# EAGLE board sot23 (EAGLE 5.06)
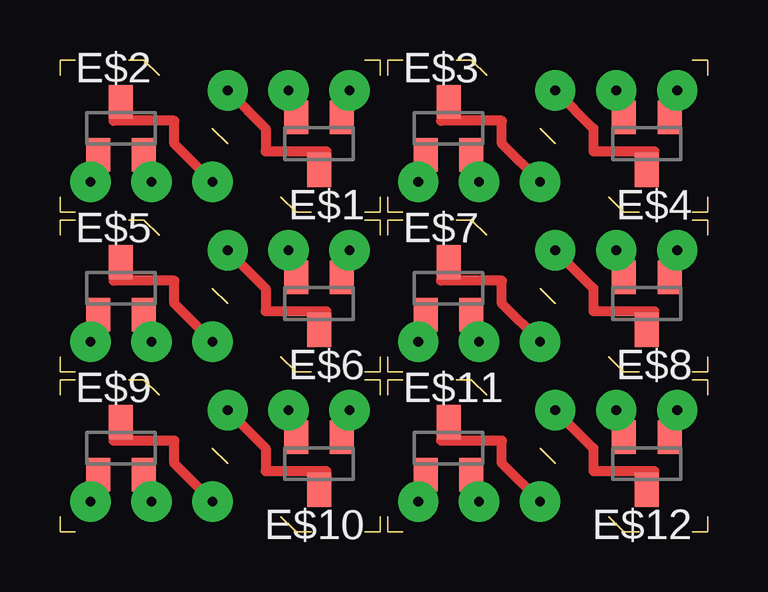
[diagram p0: board, top side]

Size 26.99 x 19.69 mm. Coordinates in mm from the lower left corner, seen from the top.
Outline: 0,19.05 0,19.69 0.64,19.69
Outline: 0.64,13.34 0,13.34 0,13.97
Outline: 13.34,13.97 13.34,13.34 12.7,13.34
Outline: 12.7,19.69 13.34,19.69 13.34,19.05
Outline: 4.13,19.05 3.49,19.69 2.86,19.69
Outline: 9.21,13.97 9.84,13.34 10.48,13.34
Outline: 6.35,16.83 6.98,16.19
Outline: 13.65,19.05 13.65,19.69 14.29,19.69
Outline: 14.29,13.34 13.65,13.34 13.65,13.97
Outline: 26.99,13.97 26.99,13.34 26.35,13.34
Outline: 26.35,19.69 26.99,19.69 26.99,19.05
Outline: 17.78,19.05 17.14,19.69 16.51,19.69
Outline: 22.86,13.97 23.49,13.34 24.13,13.34
Outline: 20,16.83 20.64,16.19
Outline: 0,12.38 0,13.02 0.64,13.02
Outline: 0.64,6.67 0,6.67 0,7.3
Outline: 13.34,7.3 13.34,6.67 12.7,6.67
Outline: 12.7,13.02 13.34,13.02 13.34,12.38
Outline: 4.13,12.38 3.49,13.02 2.86,13.02
Outline: 9.21,7.3 9.84,6.67 10.48,6.67
Outline: 6.35,10.16 6.98,9.53
Outline: 13.65,12.38 13.65,13.02 14.29,13.02
Outline: 14.29,6.67 13.65,6.67 13.65,7.3
Outline: 26.99,7.3 26.99,6.67 26.35,6.67
Outline: 26.35,13.02 26.99,13.02 26.99,12.38
Outline: 17.78,12.38 17.14,13.02 16.51,13.02
Outline: 22.86,7.3 23.49,6.67 24.13,6.67
Outline: 20,10.16 20.64,9.53
Outline: 0,5.71 0,6.35 0.64,6.35
Outline: 0.64,0 0,0 0,0.63
Outline: 13.34,0.63 13.34,0 12.7,0
Outline: 12.7,6.35 13.34,6.35 13.34,5.71
Outline: 4.13,5.71 3.49,6.35 2.86,6.35
Outline: 9.21,0.63 9.84,0 10.48,0
Outline: 6.35,3.49 6.98,2.86
Outline: 13.65,5.71 13.65,6.35 14.29,6.35
Outline: 14.29,0 13.65,0 13.65,0.63
Outline: 26.99,0.63 26.99,0 26.35,0
Outline: 26.35,6.35 26.99,6.35 26.99,5.71
Outline: 17.78,5.71 17.14,6.35 16.51,6.35
Outline: 22.86,0.63 23.49,0 24.13,0
Outline: 20,3.49 20.64,2.86
Copper layers (1*16): Top 0.035mm / dielectric 1.5mm / Bottom 0.035mm
Design rules "default": minimum track width 10mil, minimum drill 24mil, track to track 8mil, track to pad 8mil, pad to pad 8mil, via to via 8mil, smd to smd 8mil, copper to edge 40mil, drill to drill 8mil, minimum pad ring 10mil, minimum via ring 8mil, stop-mask expansion 4mil, vias tented up to drill 0mil, thermal gap 10mil

## Footprints (pad centres in the part's own frame; a part is rotated, then mirrored left to right if it is on the bottom)
SOT23B-3 = smd 1 x 1.4: 1 -0.95,-1.1; 2 0.95,-1.1; 3 0,1.1

## Placement (x,y rotation side)
E$1  [SOT23B-3]  10.79,16.19 180 top
E$2  [SOT23B-3]  2.54,16.83 0 top
E$3  [SOT23B-3]  16.19,16.83 0 top
E$4  [SOT23B-3]  24.45,16.19 180 top
E$5  [SOT23B-3]  2.54,10.16 0 top
E$6  [SOT23B-3]  10.79,9.53 180 top
E$7  [SOT23B-3]  16.19,10.16 0 top
E$8  [SOT23B-3]  24.45,9.53 180 top
E$9  [SOT23B-3]  2.54,3.49 0 top
E$10  [SOT23B-3]  10.79,2.86 180 top
E$11  [SOT23B-3]  16.19,3.49 0 top
E$12  [SOT23B-3]  24.45,2.86 180 top

## Library data of the parts
E$1-E$12 = ref-packages

## Tracks (layer width: path | path; a pad name or v marks a point on that pad's centre or on a via)
S$1  (via drill 0.41 pad 1.68)
  Top 0.406: v6.98,18.41 8.57,16.83 8.57,15.88 11.11,15.88
S$2  (via drill 0.41 pad 1.68)
  other vias: 3.81,14.61
S$3  (via drill 0.41 pad 1.68)
  other vias: 1.27,14.61
S$4  (via drill 0.41 pad 1.68)
  other vias: 12.07,18.41
S$5  (via drill 0.41 pad 1.68)
  other vias: 9.53,18.41
S$6  (via drill 0.41 pad 1.68)
  Top 0.406: v6.35,14.61 4.76,16.19 4.76,17.14 2.22,17.14
S$7  (via drill 0.41 pad 1.68)
  Top 0.406: v20,14.61 18.41,16.19 18.41,17.14 15.88,17.14
S$8  (via drill 0.41 pad 1.68)
  other vias: 14.92,14.61
S$9  (via drill 0.41 pad 1.68)
  other vias: 17.46,14.61
S$10  (via drill 0.41 pad 1.68)
  Top 0.406: v20.64,18.41 22.22,16.83 22.22,15.88 24.76,15.88
S$11  (via drill 0.41 pad 1.68)
  other vias: 25.72,18.41
S$12  (via drill 0.41 pad 1.68)
  other vias: 23.18,18.41
S$13  (via drill 0.41 pad 1.68)
  Top 0.406: v6.35,7.94 4.76,9.53 4.76,10.48 2.22,10.48
S$14  (via drill 0.41 pad 1.68)
  other vias: 1.27,7.94
S$15  (via drill 0.41 pad 1.68)
  other vias: 3.81,7.94
S$16  (via drill 0.41 pad 1.68)
  Top 0.406: v6.98,11.75 8.57,10.16 8.57,9.21 11.11,9.21
S$17  (via drill 0.41 pad 1.68)
  other vias: 12.07,11.75
S$18  (via drill 0.41 pad 1.68)
  other vias: 9.53,11.75
S$19  (via drill 0.41 pad 1.68)
  Top 0.406: v20,7.94 18.41,9.53 18.41,10.48 15.88,10.48
S$20  (via drill 0.41 pad 1.68)
  other vias: 14.92,7.94
S$21  (via drill 0.41 pad 1.68)
  other vias: 17.46,7.94
S$22  (via drill 0.41 pad 1.68)
  Top 0.406: v20.64,11.75 22.22,10.16 22.22,9.21 24.76,9.21
S$23  (via drill 0.41 pad 1.68)
  other vias: 25.72,11.75
S$24  (via drill 0.41 pad 1.68)
  other vias: 23.18,11.75
S$25  (via drill 0.41 pad 1.68)
  Top 0.406: v6.35,1.27 4.76,2.86 4.76,3.81 2.22,3.81
S$26  (via drill 0.41 pad 1.68)
  other vias: 1.27,1.27
S$27  (via drill 0.41 pad 1.68)
  other vias: 3.81,1.27
S$28  (via drill 0.41 pad 1.68)
  Top 0.406: v6.98,5.08 8.57,3.49 8.57,2.54 11.11,2.54
S$29  (via drill 0.41 pad 1.68)
  other vias: 12.07,5.08
S$30  (via drill 0.41 pad 1.68)
  other vias: 9.53,5.08
S$31  (via drill 0.41 pad 1.68)
  Top 0.406: v20,1.27 18.41,2.86 18.41,3.81 15.88,3.81
S$32  (via drill 0.41 pad 1.68)
  other vias: 14.92,1.27
S$33  (via drill 0.41 pad 1.68)
  other vias: 17.46,1.27
S$34  (via drill 0.41 pad 1.68)
  Top 0.406: v20.64,5.08 22.22,3.49 22.22,2.54 24.76,2.54
S$35  (via drill 0.41 pad 1.68)
  other vias: 25.72,5.08
S$36  (via drill 0.41 pad 1.68)
  other vias: 23.18,5.08